# Altium PCB main40v.PcbDoc
Units mil, origin at the board's own origin, x right, y up, seen from the top; angles counter-clockwise.
Board outline 3337.5 x 1275 mil, 2 copper layers (Top Layer, Bottom Layer), stack 65.792 mil thick; 21 components, 18 nets, 63 pads, 0 vias.
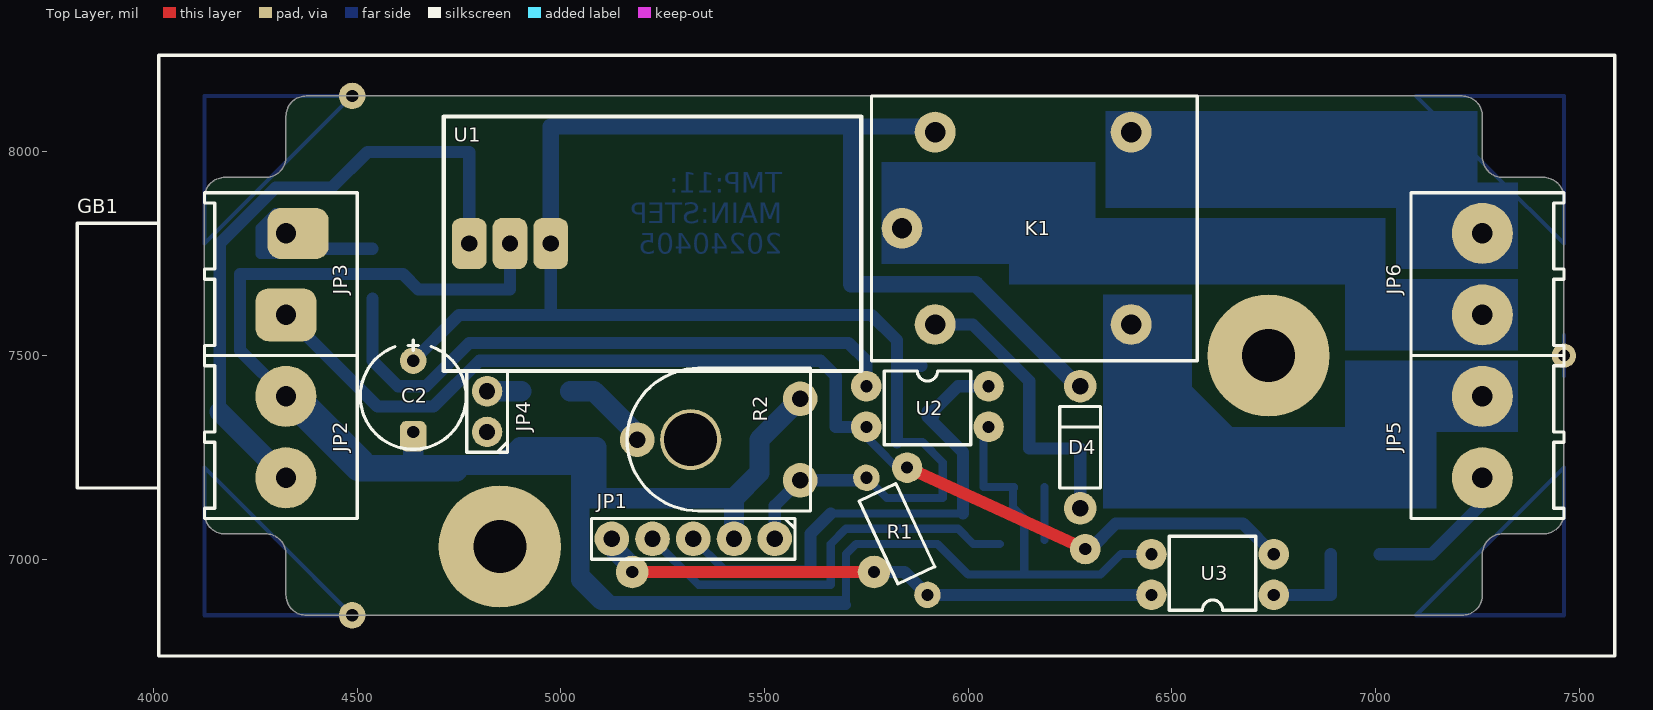
[diagram p0: Top Layer view]
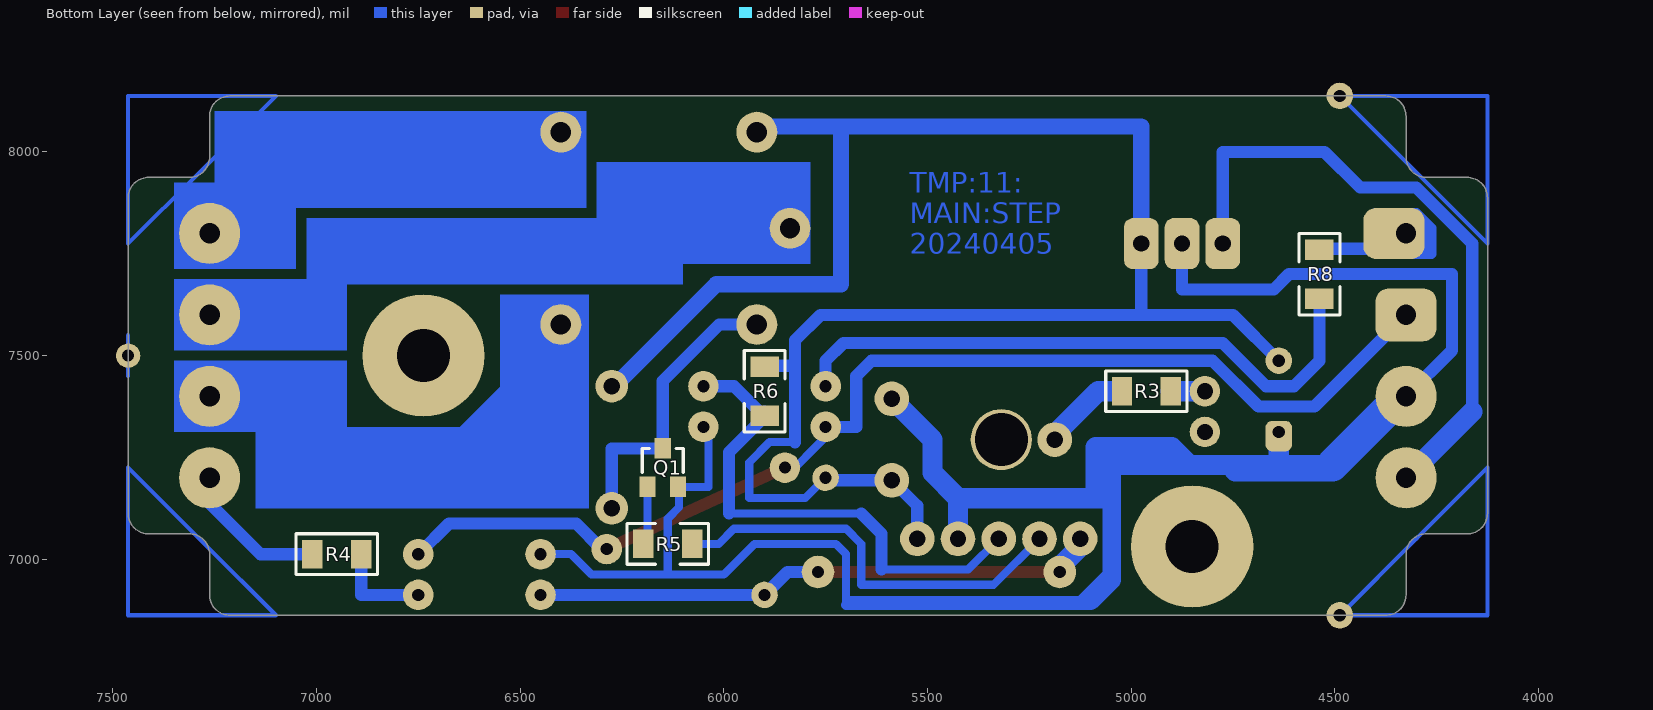
[diagram p1: Bottom Layer view, seen from below]
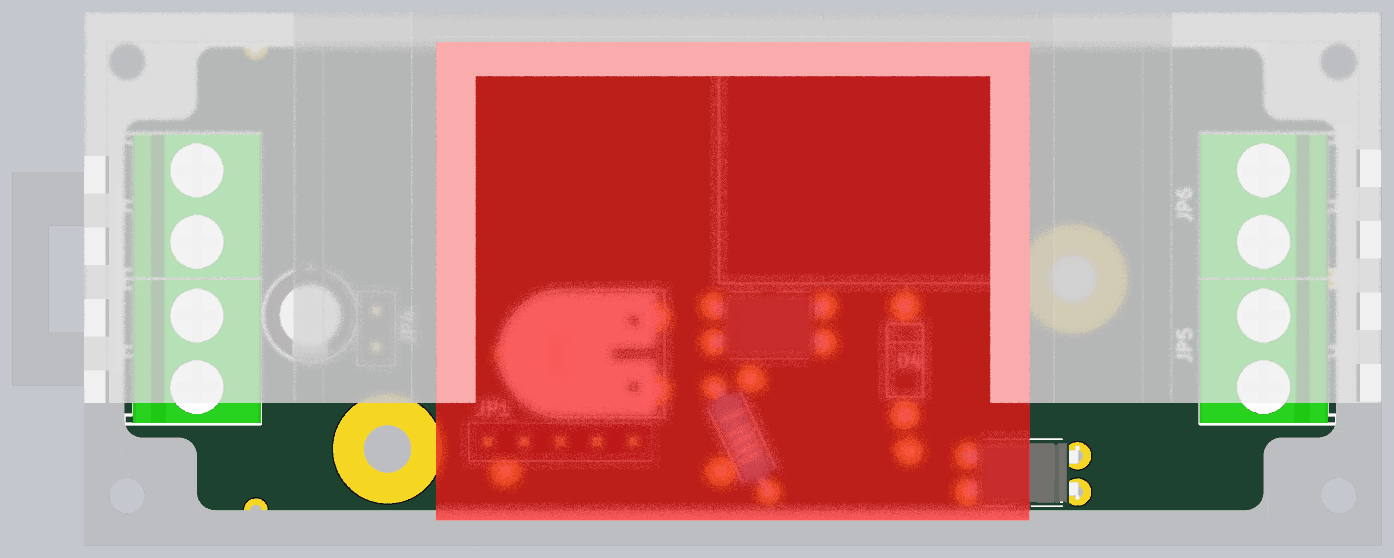
[diagram p2: 3D render of the assembled board from above, using the file's embedded part models]
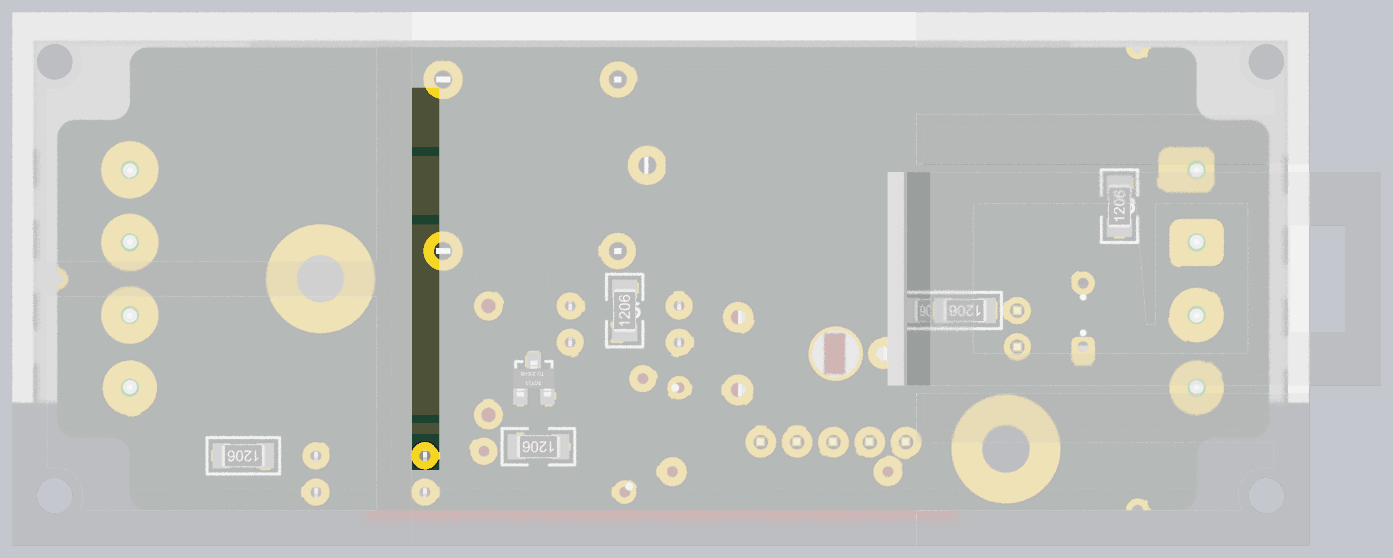
[diagram p3: 3D render of the assembled board from below, using the file's embedded part models]

## Layer stack, top to bottom
Top Layer: signal copper 1.4
Dielectric: core 62.9921, FR-4, Dk 4.8
Bottom Layer: signal copper 1.4

## Board outline
4175,7062.5 4275,7062.5 cw(c4275,7012.5) 4325,7012.5 4325,6912.5 ccw(c4375,6912.5) 4375,6862.5 7212.5,6862.5 ccw(c7212.5,6912.5) 7262.5,6912.5 7262.5,7012.5 cw(c7312.5,7012.5) 7312.5,7062.5 7412.5,7062.5 ccw(c7412.5,7112.5) 7462.5,7112.5 7462.5,7887.5 ccw(c7412.5,7887.5) 7412.5,7937.5 7312.5,7937.5 cw(c7312.5,7987.5) 7262.5,7987.5 7262.5,8087.5 ccw(c7212.5,8087.5) 7212.5,8137.5 4375,8137.5 ccw(c4375,8087.5) 4325,8087.5 4325,7987.5 cw(c4275,7987.5) 4275,7937.5 4175,7937.5 ccw(c4175,7887.5) 4125,7887.5 4125,7112.5 ccw(c4175,7112.5)

## Design rules (kind name [scope] priority, off if disabled: settings)
Clearance [All] p1: gap=12.5
FabricationTestPointUsage TestPointUsage [All] p1: valid=0 allowmultiple=FALSE
FabricationTestpoint Testpoint [All] p1: side=3 testpointundercomponent=TRUE minsize=40 maxsize=100 preferedsize=60 minholesize=0 maxholesize=40 preferedholesize=32 testpointgrid=1 allowsidetop=TRUE allowsidebottom=TRUE usegrid=TRUE gridtolerance=0.01
PolygonConnect [All] p1: connectstyle=Relief reliefconductorwidth=20 reliefentries=4 polygonreliefangle="90 Angle"
RoutingVias [All] p1: holewidth=28 width=50 viastyle="Through Hole" minholewidth=28 minwidth=50 maxholewidth=28 maxwidth=50
SilkscreenOverComponentPads [All] p1: minsilkscreentomaskgap=10
SolderMaskExpansion [All] p1: expansion=4
Width [All] p1: maxlimit=10000 minlimit=10 preferedwidth=15
25 further rules are at their usual default settings.

## Components (designator, comment, footprint, x,y, rotation, side; value= is the part's Value field where it differs from the comment)
C2 "Cap Pol" C_EL_6-3X11 4637.5,7400 r270 top
D4 "1N4007" DIODE300_1MM 6275,7275 r90 top
GB1 "Gabinete Chillemi R28T" PLA_GAB_DIN_4X2_HALF 7587.5,7500 r270 top
JP1 "Header5x1" HDR5x1 5525,7050 r180 top
JP2 "XY128V-A2P" BORNERA2#1 4225,7500 r90 top
JP3 "OUT" BORNERA2#2 4225,7900 r90 top
JP4 "HEMBRA" HDR2x1 4818.75,7312.5 r90 top
JP5 "XY128V-A2P" BORNERA2#1 7362.5,7100 r270 top
JP6 "XY128V-A2P" BORNERA2#1 7362.5,7500 r270 top
K1 "6V" RLY_SI_10A_XXV 6012.5,7812.5 r0 top
Q1 "BC817-40" SOT23 6150,7225 r180 bottom
R1 "Resistencia 1206; 47Kohm" RES300TH 5825,7062.5 r115 top
R2 "Preset" R_ADJ_METV 5587.5,7293.75 r90 top
R3 "Resistencia 1206; 47Kohm" R1206 4962.5,7412.5 r0 bottom
R4 "Resistencia 1206; 3.3Kohm" R1206 6950,7012.5 r0 bottom
R5 "Resistencia 1206; 10Kohm" R1206 6137.5,7037.5 r0 bottom
R6 "Resistencia 1206; 47Kohm" R1206 5900,7412.5 r90 bottom
R8 "Resistencia 1206; 3.3Kohm" R1206 4537.5,7700 r90 bottom
U1 "STEP_DOWN" "STEP DOWN 20180903 2150" 5225,8375 r0 top
U2 "PC817" DIP4 5750,7425 r0 top
U3 "PC817" DIP4 6750,6912.5 r180 top

## Footprints (in the part's own frame and the unit in brackets; to place one, negate y for a bottom-side part, rotate by r counter-clockwise, add the part's x,y. Pads: shape width x height; smd on the part's side, far side on the other; paste and mask are expansions set on the pad)
BORNERA2#1 [mil]
  round 150 hole 50: 1(-300,-100) 2(-100,-100)
  silkscreen extent -400,-275 0,100, body extent -397,-277 -3,77, height 531
BORNERA2#2 [mil]
  rrect50% 130x150 hole 50: 1(-300,-100)
  rrect50% 125x150 hole 50 copper offset 0,-30: 2(-100,-100)
  silkscreen extent -400,-275 0,100, body extent -397,-277 -3,77, height 531
C_EL_6-3X11 [mil] "C_EL_6-3X11"
  round 65 hole 30: 1(-87.5,0)
  rrect50% 75x65 hole 30 copper offset 10,0: 2(87.5,0)
  silkscreen extent -138,-130 130,130, body extent -124,-124 124,124, height 433
DIODE300_1MM [mil]
  round 80 hole 40: 1(-150,0) 2(150,0)
  silkscreen extent -100,-50 100,50
DIP4 [mil] "DIP14 IC"
  round 75 hole 30: 1(0,0) 2(0,-100) 3(300,-100) 4(300,0)
  silkscreen extent 44,-144 256,38, body extent -5,-143 305,38, height 169
HDR2x1 [mil] "HEADER 2x1"
  round 75 hole 40: 1(0,0) 2(100,0)
  silkscreen extent -50,-50 150,50, body extent -50,-50 150,50, height 336
HDR5x1 [mil] "HEADER 5x1"
  round 85 hole 40: 1(0,0) 2(100,0) 3(200,0) 4(300,0) 5(400,0)
  silkscreen extent -50,-50 450,50, body extent -51,-51 449,49, height 336
PLA_GAB_DIN_4X2_HALF [mil] "DISIPADOR"
  silkscreen extent -738,-3775 738,0, body extent -735,-3770 735,0, height 1909
R1206 [mil]
  rect 50x70 smd: 1(-60,0) 2(60,0)
  silkscreen extent -100,-50 100,50, body extent -63,-31 63,31, height 34
R_ADJ_METV [mil]
  round 85 hole 40: 1(-100,0) 2(0,400) 3(100,0)
  silkscreen extent -175,-25 175,425, body extent -167,0 167,433, height 118
RES300TH [mil] "RESISTENCIA THROUGH-HOLE"
  round 65 hole 30: 1(156.31,9.86) 2(-167.64,-4.58)
  silkscreen extent -112,-50 112,50, body extent -159,-47 163,47, height 98
RLY_SI_10A_XXV [mm] "Relay simple inversor 10A / XXV"
  round 2.54 hole 1.27: 1(-4.445,0) 2(9.842,6) 3(9.842,-6) 4(-2.381,6) 5(-2.381,-6)
  silkscreen extent -6.35,-8.25 13.97,8.25, body extent -5.77,-7.9 14.03,7.9, height 15.8
SOT23 [mm] "SOT23"
  rect 1.016x1.27 smd: 1(-0.95,-1.2) 2(0.95,-1.2) 3(0,1.2)
  silkscreen extent -1.27,-0.3 1.28,1.2, body extent -1.5,-1.25 1.5,1.25, height 1.09
"STEP DOWN 20180903 2150" [mil]
  rrect50% 85x125 hole 40: 1(-450,-600) 2(-350,-600) 3(-250,-600)
  silkscreen extent -512,-912 512,-288, body extent -512,-912 510,-283, height 675

## Part data
C2: "Capacitor Polarizado"
GB1: library part "Gabinete Chillemi R28T; Cuerpo Negro; Frente Acrilico Rojo", "Gabinete Chillemi R28T; Cuerpo Negro; Frente Acrilico Rojo"
JP1: "Header 5x1"
JP2 JP3 JP5 JP6: library part "Bornera Tornillos 2x1; Altura = 13.8mm", "Bornera Tornillos 2x1; Altura = 13.8mm"
JP4: library part Header2x1, "Header 2x1"
K1: library part "Relay 24V; 1 Inversor", "Relay 24V; 1 Inversor"
R2: "Resistencia Variable"

## Free pads (board coordinates)
  round 65 hole 30: 0(4487.5,6862.5) 1(4487.5,8137.5)
  round 80 hole 30: 0(5175,6968.75) 0(5768.75,6968.75)
  round 75 hole 30: 0(5850,7225) 0(6287.5,7025)
  round 60 hole 30: 2(7462.5,7500)
  round 300 hole 130: 12(4850,7031.25) 12(6737.5,7500)
  round 150 hole 130: 12(5318.75,7293.75)

## Nets (pads, with @x,y where several pads share a name; then routed paths per layer and width w, separated by ;. In a path a pad name is that pad's centre, name@x,y a point inside that pad or via, vN(x,y) a via of type N, cw(c..) or ccw(c..) an arc to the next point about the centre after c; other vN are vias at no path point)
5.5V: C2.1 D4.2 JP1.1 K1.4 R1.1 R2.1 R6.2 U1.3 | length 4796.2
  Bottom Layer w20: R1.1 5800,7150 5937.5,7150 5937.5,7237.5 5887.5,7287.5 5825,7287.5
  Bottom Layer w30: C2.1 4750,7600 4975,7600 ; U1.3@4975,7750 4975,7600 ; JP1.1@5512.5,7062.5 JP1.1 5525,7131.25 R2.1 R1.1@5743.75,7193.75 ; 5825,7287.5 5825,7475 ; R6.2@5885,7475 5825,7475 ; 4975,7600 5762.5,7600 5825,7537.5 5825,7475
  Bottom Layer w40: U1.3 4975,8062.5 5712.5,8062.5 ; K1.4@5925,8061.22 5925,8062.5 5712.5,8062.5 ; D4.2@6281.25,7412.5 6018.75,7675 5712.5,7675 5712.5,8062.5
COM: JP6.2 K1.1
"EXT RESET": JP1.5 pad.0@5175,6968.75 pad.0@5768.75,6968.75 R1.2 U3.4 | length 1395.5
  Top Layer w30: pad.0@5175,6968.75 pad.0@5768.75,6968.75
  Bottom Layer w30: pad.0@5768.75,6968.75 5843.75,6968.75 R1.2 U3.4
  Bottom Layer w50: JP1.5@5118.75,7037.5 pad.0@5187.5,6968.75
GND: C2.2 JP1.2 JP2.2 Q1.2 R2.3 U1.2 U2.3 U3.3 | length 6805.8
  Bottom Layer w20: 5062.5,6962.5 5125,6900 ; 5100,6900 5125,6900 ; 5700,6887.5 5700,6900 ; U2.3@6037.5,7325 6037.5,7177.76 Q1.2@6109.74,7177.76 ; U3.3 6375,7012.5 6325,6962.5 6137.5,6962.5 ; 5125,6900 5700,6900 ; 5700,6900 5700,7012.5 5725,7037.5 5925,7037.5 6000,6962.5 6137.5,6962.5 ; Q1.2@6109.74,7177.76 Q1.2 ; Q1.2@6109.74,7177.76 6109.74,7127.76 6137.5,7100 6137.5,6962.5 ; Q1.2 6112.5,7175 6112.59,7177.65 Q1.2
  Bottom Layer w25: 5037.5,7231.25 5037.5,6950 5050,6950 ; 5100,6887.5 5700,6887.5
  Bottom Layer w30: JP2.2@4337.5,7400 JP2.2 4212.5,7512.5 4212.5,7700 4612.5,7700 4650,7662.5 4875,7662.5 U1.2
  Bottom Layer w40: 5050,6950 5050,7150 5050,7275
  Bottom Layer w50: 4506.25,7231.25 4637.5,7231.25 ; C2.2 4637.5,7231.25 ; 5037.5,7231.25 4856.25,7231.25 ; 5050,6950 5100,6900 ; 5050,7150 5425,7150 ; 5050,7275 5087.5,7275 ; 5087.5,7150 5087.5,7275 ; JP1.2 5425,7150 ; R2.3 5487.5,7293.75 5487.5,7212.5 5425,7150 ; 4637.5,7231.25 4856.25,7231.25 ; 4856.25,7231.25 4900,7275 5087.5,7275
  Bottom Layer w55: 4506.25,7218.75 4743.75,7218.75
  Bottom Layer w80: JP2.2@4337.5,7400 4506.25,7231.25
GND2: JP3.1 pad.0@5850,7225 pad.0@6287.5,7025 U2.2 U3.2 | length 2834.8
  Top Layer w30: pad.0@5850,7225 pad.0@6287.5,7025
  Bottom Layer w20: U2.2@5750,7300 pad.0@5850,7200
  Bottom Layer w30: JP3.1 4550,7375 4687.5,7375 4800,7487.5 5637.5,7487.5 5675,7450 5675,7325 U2.2 ; pad.0@6300,7025 6362.5,7087.5 6675,7087.5 U3.2
IN: JP1.3 R6.1 U2.4 | length 1253.1
  Bottom Layer w20: JP1.3 5400,6975 5612.5,6975 ; 5662.5,7112.5 5987.5,7112.5
  Bottom Layer w30: 5612.5,6975 5612.5,7062.5 5662.5,7112.5 ; R6.1@5900,7362.5 R6.1 5900,7350 5987.5,7262.5 5987.5,7112.5 ; R6.1@5915,7352.5 5902.5,7352.5 5975,7425 U2.4@6025,7425
IN2: JP5.2 R4.2 | length 405.2
  Bottom Layer w30: R4.2 7137.5,7012.5 7300,7175 7287.5,7175 JP5.2
LOCK: JP4.2 R3.1 | length 83.8
  Bottom Layer w50: JP4.2 R3.1
NC: JP6.1 K1.2 | length 1237.7
  Bottom Layer w10: 7100,8137.5 7287.5,7950 7462.5,7775 7462.5,8137.5 7100,8137.5
NetD4_1: D4.1 K1.5 Q1.3 | length 732.5
  Bottom Layer w30: K1.5@5925,7576.28 6011.22,7576.28 6150,7437.5 Q1.3 6275,7272.24 D4.1@6275,7112.5
NetJP3_2: JP3.2 R8.2 | length 525.5
  Bottom Layer w25: 4275,7812.5 4275,7750 ; JP3.2@4337.5,7750 4275,7750 ; JP3.2@4400,7850 4300,7850 4262.5,7812.5 4262.5,7750 4275,7750
  Bottom Layer w30: JP3.2@4365,7762.5 R8.2@4537.5,7762.5
NetQ1_1: Q1.1 R5.2 | length 130.2
  Bottom Layer w20: R5.2@6187.4,7047.6 Q1.1
NetR2_2: R2.2 R3.2 | length 209
  Bottom Layer w50: R3.2 5081.25,7412.5 R2.2@5187.5,7306.25
NetR4_1: R4.1 U3.1 | length 240
  Bottom Layer w30: U3.1 6890,6912.5 R4.1
NetR8_1: R8.1 U2.1 | length 1515.5
  Bottom Layer w30: R8.1 4537.5,7487.5 4600,7425 4668.75,7425 4775,7531.25 5693.75,7531.25 5706.25,7531.25 5750,7487.5 U2.1
NOP: JP5.1 K1.3 | length 986
  Bottom Layer w50: 6425,7475 6725,7175 ; 6462.5,7475 6762.5,7175 6900,7175
OUT: JP1.4 R5.1 | length 1030.2
  Bottom Layer w20: JP1.4 5337.5,6937.5 5662.5,6937.5 5662.5,7037.5 5700,7075 5975,7075 6012.5,7037.5 R5.1
VALIM: JP2.1 U1.1 | length 1573
  Bottom Layer w30: 4162.5,7362.5 4162.5,7775 4300,7912.5 4437.5,7912.5 4525,8000 4775,8000 U1.1
  Bottom Layer w50: 4162.5,7362.5 JP2.1
pads on no net: JP4.1
copper on no net: | length 3813
  Bottom Layer w10: 7462.5,7450 7462.5,7550 ; 4125,6862.5 4125,7225 4300,7050 4487.5,6862.5 4125,6862.5 ; 4125,7775 4487.5,8137.5 4125,8137.5 4125,7775 ; 7100,6862.5 7462.5,6862.5 7462.5,7225 7275,7037.5 7100,6862.5

## Other copper
Bottom Layer:
  rectangle net NC: 7050,7712.5 7350,7925
  rectangle net NC: 6337.5,7862.5 7250,8100
  rectangle net COM: 5787.5,7725 6312.5,7975
  rectangle net COM: 6100,7675 7025,7837.5
  rectangle net COM: 6925,7512.5 7350,7687.5
  rectangle net NOP: 6925,7312.5 7350,7487.5
  rectangle net NOP: 6331.25,7125 6550,7650
  region net NOP: 7150,7125 7150,7325 6450,7325 6450,7125
  text "TMP:11:" at 5543.75,7900 h50
  text "MAIN:STEP" at 5543.75,7825 h50
  text "20240405" at 5543.75,7750 h50

## Silkscreen, mask and mechanical layers (free items; w line width, h text height)
etiquetas:
  lines w7.87: 4125,7775 4125,7887.5 cw(c4175,7887.5) 4175,7937.5 ; 4375,6862.5 4487.5,6862.5
  lines w10: 3256.25,7300 3962.5,7300 ; 3256.25,7500 3962.5,7500 ; 3256.25,7700 3962.5,7700 ; 3500,7900 3962.5,7900 3962.5,7100 ; 3593.75,7900 3256.25,7900 3256.25,7100 ; 3256.25,7100 3962.5,7100 ; 3256.25,7100 3962.5,7100 ; 7562.5,7300 7918.75,7300 ; 7562.5,7300 7562.5,7900 ; 7562.5,7300 7918.75,7500 ; 7562.5,7300 7918.75,7300 ; 7562.5,7500 7918.75,7500 ; 7562.5,7500 7918.75,7300 ; 7562.5,7500 7918.75,7500 ; 7562.5,7900 7562.5,7100 8268.75,7100 8268.75,7900 ; 7562.5,7900 7575,7900 8268.75,7900 ; 7562.5,7900 7918.75,7900 ; 7918.75,7300 7918.75,7900 ; 7918.75,7300 7918.75,7900 ; 7918.75,7300 8268.75,7300 8268.75,7900 ; 7918.75,7300 7918.75,7900 ; 7918.75,7700 8268.75,7700 ; 7918.75,7700 8268.75,7700 ; 7918.75,7700 8268.75,7900 ; 7918.75,7900 8268.75,7900 ; 7918.75,7900 8268.75,7700 ; 7918.75,7900 8268.75,7900 ; 7918.75,7900 8268.75,7900
  text "COUNT +" at 3293.75,7762.5 h60
  text "OUT" at 7600,7762.5 h60
  text "NORM." at 7600,7662.5 h60
  text "COUNT -" at 3293.75,7562.5 h60
  text "ABIER." at 7600,7562.5 h60
  text "OUT" at 7950,7562.5 h60
  text "NORM." at 7950,7462.5 h60
  text "220V" at 3293.75,7362.5 h60
  text "CERR." at 7950,7362.5 h60
  text "LED SALIDA" at 7600,7175 h60
  text "220V" at 3293.75,7162.5 h60
borderPcb:
  lines w7.87: 4125,7112.5 ccw(c4175,7112.5) 4175,7062.5 4275,7062.5 cw(c4275,7012.5) 4325,7012.5 4325,6912.5 ccw(c4375,6912.5) 4375,6862.5 4487.5,6862.5 7100,6862.5 7212.5,6862.5 ccw(c7212.5,6912.5) 7262.5,6912.5 7262.5,7012.5 cw(c7312.5,7012.5) 7312.5,7062.5 7412.5,7062.5 ccw(c7412.5,7112.5) 7462.5,7112.5 7462.5,7225 7462.5,7775 7462.5,7887.5 ccw(c7412.5,7887.5) 7412.5,7937.5 7312.5,7937.5 cw(c7312.5,7987.5) 7262.5,7987.5 7262.5,8087.5 ccw(c7212.5,8087.5) 7212.5,8137.5 7100,8137.5 4487.5,8137.5 4375,8137.5 ccw(c4375,8087.5) 4325,8087.5 4325,7987.5 cw(c4275,7987.5) 4275,7937.5 4175,7937.5 ccw(c4175,7887.5) 4125,7887.5 4125,7112.5
topOverlayAux:
  text "RB2" at 5150,6862.5 h45 r90
  text "RB1" at 5250,6862.5 h45 r90
  text "RB0" at 5350,6862.5 h45 r90
  text "GND" at 5450,6862.5 h45 r90
  text "VCC" at 5550,6862.5 h45 r90
  text "RC2" at 5650,6862.5 h45 r90
  text "/DP" at 5718.75,6862.5 h45 r90
mechanicalAux:
  lines w7.87: 4793.75,7312.5 4843.75,7312.5 ; 4793.75,7412.5 4843.75,7412.5 ; 4818.75,7287.5 4818.75,7337.5 ; 4818.75,7387.5 4818.75,7437.5 ; 5100,7050 5150,7050 ; 5125,7025 5125,7075 ; 5600,7100 5650,7100 ; 5625,7075 5625,7125
  lines w10: 4687.5,6862.5 4687.5,8137.5 ; 6900,6862.5 6900,8137.5 ; 4700,6875 4700,8125 6887.5,8125 6887.5,6875 4700,6875

## Dimensions
4487.5,6862.5 to 4487.5,8137.5 on dimensionPcb
7462.5,7887.5 to 4125,7887.5 on dimensionPcb
7462.5,7112.5 to 6900,6862.5 on dimensionAux
4125,7112.5 to 4687.5,6862.5 on dimensionAux
7587.5,6762.5 to 7000,6862.5 on dimensionAux
6937.5,8137.5 to 7587.5,8237.5 on dimensionAux
7462.5,7000 to 7587.5,6762.5 on dimensionAux
4012.5,6762.5 to 4125,7112.5 on dimensionAux